# Altium PCB NumatoShieldAutoRouted.PcbDoc (part 2 of 2)
Units mm, origin at the board's own origin, x right, y up, seen from the top; angles counter-clockwise.
Board outline 127 x 127 mm, 4 copper layers (Top Layer, Mid-Layer 1, Mid-Layer 2, Bottom Layer); 8 components, 163 nets, 352 pads, 0 vias.
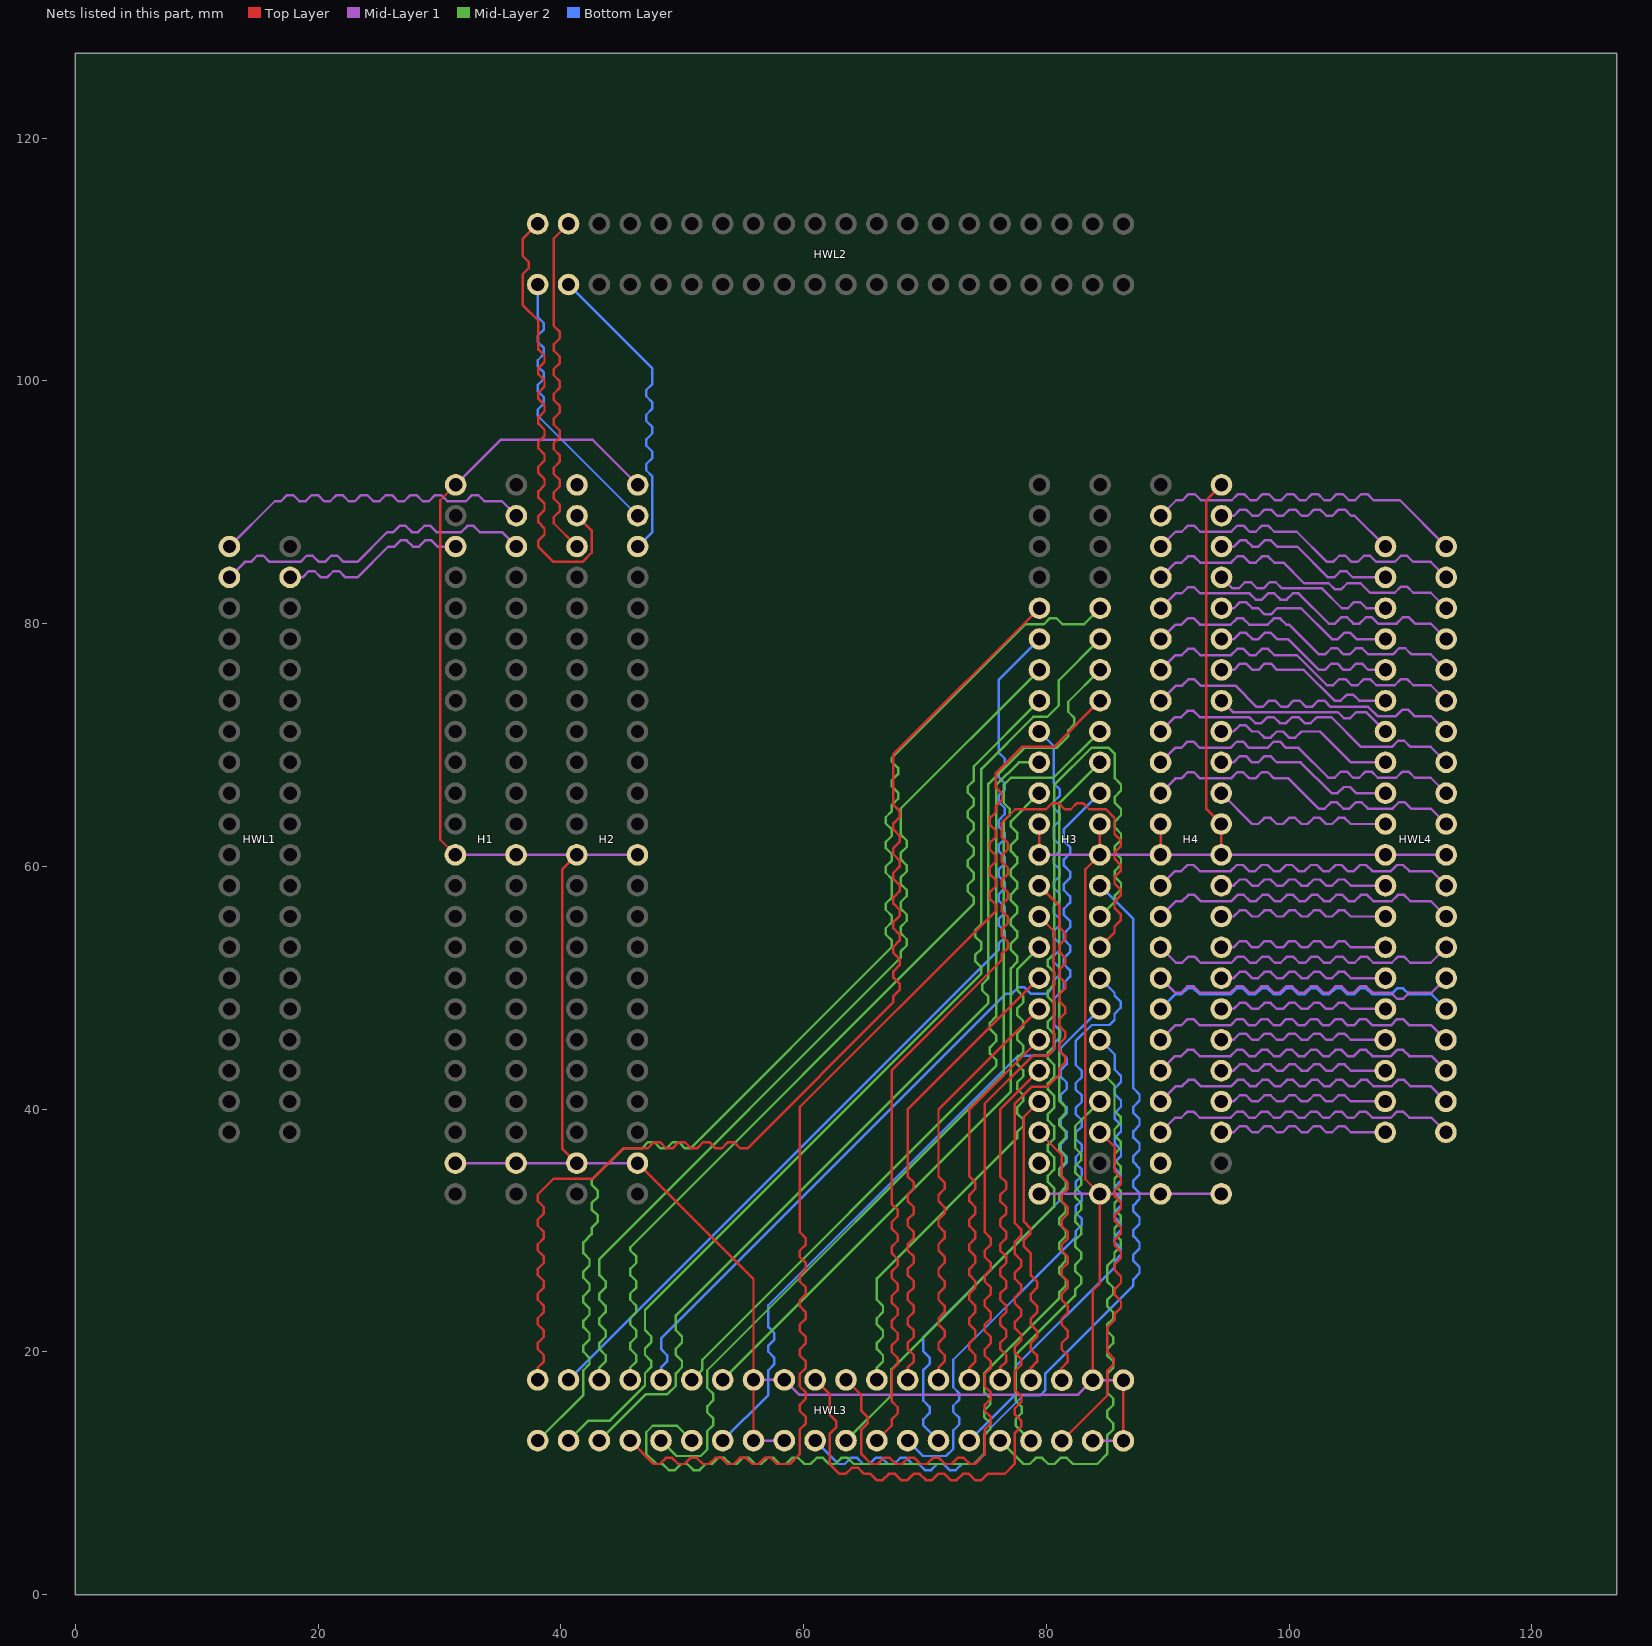
[diagram p4: the nets of this part, all layers, seen from the top]

## Nets (pads, with @x,y where several pads share a name; then routed paths per layer and width w, separated by ;. In a path a pad name is that pad's centre, name@x,y a point inside that pad or via, vN(x,y) a via of type N, cw(c..) or ccw(c..) an arc to the next point about the centre after c; other vN are vias at no path point) (continued)
GND: H1.3 H1.4 H1.23 H1.24 H1.48 H2.3 H2.4 H2.23 H2.24 H2.47 H3.1 H3.2 H3.23 H3.24 H3.25 H3.26 H4.1 H4.2 H4.23 H4.24 H4.25 H4.26 H4.47 HWL3.7 HWL3.8 HWL3.18 HWL3.19 HWL3.20 HWL3.21 HWL3.31 HWL3.32 HWL4.10 HWL4.29 | length 306.6
  Top Layer w0.203: H1.24@31.317,60.96 30.074,62.204 30.074,90.175 H1.48@31.339,91.44 ; H2.4@41.317,35.56 40.107,36.771 40.107,59.749 H2.24@41.317,60.96 ; H2.3@46.317,35.56 55.88,25.997 HWL3.32@55.88,17.7 HWL3.7@55.88,12.7 ; H3.24@79.417,60.96 H3.26@79.417,63.5 ; HWL3.21@83.82,17.679 83.82,25.044 84.417,25.642 H3.1@84.417,33.02 83.21,34.227 83.21,59.753 H3.23@84.417,60.96 H3.25@84.417,63.5 ; HWL3.19@86.36,12.679 HWL3.20@86.36,17.679 ; H4.24@89.417,60.96 H4.26@89.417,63.5 ; H4.23@94.417,60.96 H4.25@94.417,63.5 93.193,64.725 93.193,90.194 H4.47@94.439,91.44
  Mid-Layer 1 w0.203: H1.4@31.317,35.56 H1.3@36.317,35.56 H2.4@41.317,35.56 H2.3@46.317,35.56 ; H1.24@31.317,60.96 H1.23@36.317,60.96 H2.24@41.317,60.96 H2.23@46.317,60.96 ; H1.48@31.339,91.44 35.047,95.148 42.63,95.148 H2.47@46.339,91.44 ; HWL3.7@55.88,12.7 HWL3.8@58.42,12.7 ; HWL3.32@55.88,17.7 HWL3.31@58.42,17.7 59.635,16.485 82.626,16.485 HWL3.21@83.82,17.679 HWL3.20@86.36,17.679 ; H3.2@79.417,33.02 H3.1@84.417,33.02 H4.2@89.417,33.02 H4.1@94.417,33.02 ; H3.24@79.417,60.96 H3.23@84.417,60.96 H4.24@89.417,60.96 H4.23@94.417,60.96 HWL4.10@107.95,60.96 HWL4.29@112.95,60.96 ; HWL3.18@83.82,12.679 HWL3.19@86.36,12.679
H12: H1.45 HWL1.0 | length 29
  Mid-Layer 1 w0.203: HWL1.0@12.7,86.36 16.434,90.094 16.942,90.094 17.45,90.602 17.958,90.602 18.466,90.094 18.974,90.094 19.482,90.602 19.99,90.602 20.498,90.094 21.006,90.094 21.514,90.602 22.022,90.602 22.53,90.094 23.038,90.094 23.546,90.602 24.054,90.602 24.562,90.094 25.07,90.094 25.578,90.602 26.086,90.602 26.594,90.094 27.102,90.094 27.61,90.602 28.118,90.602 28.626,90.094 29.134,90.094 29.642,90.602 30.15,90.602 30.658,90.094 32.182,90.094 32.69,90.602 33.198,90.602 33.706,90.094 35.145,90.094 H1.45@36.339,88.9
H13: H2.43 HWL2.1 | length 26.6
  Bottom Layer w0.203: HWL2.1@40.64,107.95 47.549,101.041 47.549,99.762 47.041,99.254 47.041,98.746 47.549,98.238 47.549,97.73 47.041,97.222 47.041,96.714 47.549,96.206 47.549,95.698 47.041,95.19 47.041,94.682 47.549,94.174 47.549,93.666 47.041,93.158 47.041,92.65 47.549,92.142 47.549,87.57 H2.43@46.339,86.36
H14: H2.44 HWL2.38 | length 31.3
  Top Layer w0.203: HWL2.38@40.64,112.95 39.421,111.731 39.421,104.534 39.929,104.026 39.929,103.518 39.421,103.01 39.421,102.502 39.929,101.994 39.929,101.486 39.421,100.978 39.421,100.47 39.929,99.962 39.929,99.454 39.421,98.946 39.421,98.438 39.929,97.93 39.929,97.422 39.421,96.914 39.421,96.406 39.929,95.898 39.929,95.39 39.421,94.882 39.421,94.374 39.929,93.866 39.929,93.358 39.421,92.85 39.421,92.342 39.929,91.834 39.929,91.326 39.421,90.818 39.421,90.31 39.929,89.802 39.929,89.294 39.421,88.786 39.421,88.278 H2.44@41.339,86.36
H15: H1.43 HWL1.1 | length 28.2
  Mid-Layer 1 w0.203: HWL1.1@12.7,83.82 13.97,85.09 14.478,85.09 14.986,85.598 15.494,85.598 16.002,85.09 18.542,85.09 19.05,85.598 19.558,85.598 20.066,85.09 20.574,85.09 21.082,85.598 21.59,85.598 22.098,85.09 23.241,85.09 25.705,87.554 26.213,87.554 26.721,88.062 27.229,88.062 27.737,87.554 28.245,87.554 28.753,88.062 29.261,88.062 29.769,87.554 31.801,87.554 32.309,88.062 32.817,88.062 33.325,87.554 35.145,87.554 H1.43@36.339,86.36
H16: H1.44 HWL1.38 | length 16.4
  Mid-Layer 1 w0.203: HWL1.38@17.7,83.82 18.716,83.82 19.224,84.328 19.732,84.328 20.24,83.82 20.748,83.82 21.256,84.328 21.764,84.328 22.272,83.82 23.241,83.82 25.781,86.36 26.289,86.36 26.797,86.868 27.305,86.868 27.813,86.36 28.321,86.36 28.829,86.868 29.337,86.868 29.845,86.36 H1.44@31.339,86.36
INITB: H3.4
J13: H2.45 HWL2.0 | length 24.1
  Bottom Layer w0.203: HWL2.0@38.1,107.95 38.1,105.267 38.608,104.759 38.608,104.251 38.1,103.743 38.1,103.235 38.608,102.727 38.608,102.219 38.1,101.711 38.1,101.203 38.608,100.695 38.608,100.187 38.1,99.679 38.1,99.171 38.608,98.663 38.608,98.155 38.1,97.647 38.1,97.139 H2.45@46.339,88.9
K12: H4.46 HWL4.39 | length 28.6
  Mid-Layer 1 w0.203: H4.46@89.439,88.9 90.709,90.17 91.217,90.17 91.725,90.678 92.233,90.678 92.741,90.17 95.281,90.17 95.789,90.678 96.297,90.678 96.805,90.17 97.313,90.17 97.821,90.678 98.329,90.678 98.837,90.17 99.345,90.17 99.853,90.678 100.361,90.678 100.869,90.17 101.377,90.17 101.885,90.678 102.393,90.678 102.901,90.17 103.409,90.17 103.917,90.678 104.425,90.678 104.933,90.17 105.441,90.17 105.949,90.678 106.457,90.678 106.965,90.17 109.14,90.17 HWL4.39@112.95,86.36
K13: H4.45 HWL4.0 | length 16.7
  Mid-Layer 1 w0.203: H4.45@94.439,88.9 95.455,88.9 95.963,89.408 96.471,89.408 96.979,88.9 97.487,88.9 97.995,89.408 98.503,89.408 99.011,88.9 99.519,88.9 100.027,89.408 100.535,89.408 101.043,88.9 101.551,88.9 102.059,89.408 102.567,89.408 103.075,88.9 103.583,88.9 104.091,89.408 104.599,89.408 105.107,88.9 105.41,88.9 HWL4.0@107.95,86.36
K14: H2.46 HWL2.39 | length 40.2
  Top Layer w0.203: HWL2.39@38.1,112.95 36.855,111.705 36.855,110.32 37.363,109.812 37.363,109.304 36.855,108.796 36.855,106.256 38.151,104.961 38.151,102.591 38.659,102.083 38.659,101.575 38.151,101.067 38.151,100.559 38.659,100.051 38.659,99.543 38.151,99.035 38.151,98.527 38.659,98.019 38.659,97.511 38.151,97.003 38.151,96.495 38.659,95.987 38.659,95.479 38.151,94.971 38.151,94.463 38.659,93.955 38.659,93.447 38.151,92.939 38.151,92.431 38.659,91.923 38.659,91.415 38.151,90.907 38.151,90.399 38.659,89.891 38.659,89.383 38.151,88.875 38.151,88.367 38.659,87.859 38.659,87.351 38.151,86.843 38.151,86.335 39.395,85.09 41.783,85.09 42.545,85.852 42.545,87.694 H2.46@41.339,88.9
K15: H3.38 HWL3.38 | length 80.5
  Bottom Layer w0.203: HWL3.38@40.64,17.7 76.073,53.133 76.073,53.641 76.581,54.149 76.581,54.657 76.073,55.165 76.073,55.673 76.581,56.181 76.581,56.689 76.073,57.197 76.073,57.705 76.581,58.213 76.581,58.721 76.073,59.229 76.073,59.737 76.581,60.245 76.581,60.753 76.073,61.261 76.073,61.769 76.581,62.277 76.581,62.785 76.073,63.293 76.073,63.801 76.581,64.309 76.581,64.817 76.073,65.325 76.073,65.833 76.581,66.341 76.581,66.849 76.073,67.357 76.073,67.865 76.581,68.373 76.581,68.881 76.073,69.389 76.073,75.374 H3.38@79.439,78.74
K16: H3.37 HWL3.1 | length 87.6
  Mid-Layer 2 w0.203: HWL3.1@40.64,12.7 42.291,14.351 44.059,14.351 46.939,17.231 46.939,18.247 47.447,18.755 47.447,19.263 46.939,19.771 46.939,20.279 47.447,20.787 47.447,21.295 46.939,21.803 46.939,23.47 74.651,51.181 74.651,51.689 74.143,52.197 74.143,52.705 74.651,53.213 74.651,53.721 74.143,54.229 74.143,54.737 74.651,55.245 74.651,68.047 78.943,72.339 80.086,72.339 81.026,73.279 81.026,75.327 H3.37@84.439,78.74
L12: H3.40 HWL3.39 | length 96.6
  Top Layer w0.203: HWL3.39@38.1,17.7 38.1,18.716 38.608,19.224 38.608,19.732 38.1,20.24 38.1,20.748 38.608,21.256 38.608,21.764 38.1,22.272 38.1,22.78 38.608,23.288 38.608,23.796 38.1,24.304 38.1,24.812 38.608,25.32 38.608,25.828 38.1,26.336 38.1,26.844 38.608,27.352 38.608,27.86 38.1,28.368 38.1,28.876 38.608,29.384 38.608,29.892 38.1,30.4 38.1,30.908 38.608,31.416 38.608,31.924 38.1,32.432 38.1,32.969 39.421,34.29 42.647,34.29 45.136,36.779 47.168,36.779 47.676,37.287 48.184,37.287 48.692,36.779 49.2,36.779 49.708,37.287 50.216,37.287 50.724,36.779 51.232,36.779 51.74,37.287 52.248,37.287 52.756,36.779 53.264,36.779 53.772,37.287 54.28,37.287 54.788,36.779 55.372,36.779 67.412,48.819 67.412,49.327 67.92,49.835 67.92,50.343 67.412,50.851 67.412,51.359 67.92,51.867 67.92,52.375 67.412,52.883 67.412,53.391 67.92,53.899 67.92,54.407 67.412,54.915 67.412,55.423 67.92,55.931 67.92,56.439 67.412,56.947 67.412,57.455 67.92,57.963 67.92,58.471 67.412,58.979 67.412,59.487 67.92,59.995 67.92,60.503 67.412,61.011 67.412,61.519 67.92,62.027 67.92,62.535 67.412,63.043 67.412,63.551 67.92,64.059 67.92,64.567 67.412,65.075 67.412,69.253 H3.40@79.439,81.28
L13: H3.39 HWL3.0 | length 101
  Mid-Layer 2 w0.203: HWL3.0@38.1,12.7 41.859,16.459 41.859,18.491 42.367,18.999 42.367,19.507 41.859,20.015 41.859,20.523 42.367,21.031 42.367,21.539 41.859,22.047 41.859,22.555 42.367,23.063 42.367,23.571 41.859,24.079 41.859,24.587 42.367,25.095 42.367,25.603 41.859,26.111 41.859,26.619 42.367,27.127 42.367,27.635 41.859,28.143 41.859,29.032 42.545,29.718 42.545,30.226 43.053,30.734 43.053,31.242 42.545,31.75 42.545,32.258 43.053,32.766 43.053,33.274 42.545,33.782 42.545,34.163 45.161,36.779 46.685,36.779 47.193,37.287 47.701,37.287 48.209,36.779 48.717,36.779 49.225,37.287 49.733,37.287 50.241,36.779 50.673,36.779 67.285,53.391 67.285,53.899 66.777,54.407 66.777,54.915 67.285,55.423 67.285,55.931 66.777,56.439 66.777,56.947 67.285,57.455 67.285,58.979 66.777,59.487 66.777,59.995 67.285,60.503 67.285,61.011 66.777,61.519 66.777,62.027 67.285,62.535 67.285,63.043 66.777,63.551 66.777,64.059 67.285,64.567 67.285,65.075 67.793,65.583 67.793,66.091 67.285,66.599 67.285,67.107 67.793,67.615 67.793,68.123 67.285,68.631 67.285,68.961 78.283,79.959 79.807,79.959 80.315,80.467 80.823,80.467 81.331,79.959 83.118,79.959 H3.39@84.439,81.28
L14: H4.44 HWL4.38 | length 28.1
  Mid-Layer 1 w0.203: H4.44@89.439,86.36 90.658,87.579 91.166,87.579 91.674,88.087 92.182,88.087 92.69,87.579 95.23,87.579 95.738,88.087 96.246,88.087 96.754,87.579 97.262,87.579 97.77,88.087 98.278,88.087 98.786,87.579 100.635,87.579 103.124,85.09 103.632,85.09 104.14,85.598 104.648,85.598 105.156,85.09 105.664,85.09 106.172,85.598 106.68,85.598 107.188,85.09 108.712,85.09 109.22,85.598 109.728,85.598 110.236,85.09 111.68,85.09 HWL4.38@112.95,83.82
L15: H4.40 HWL4.36 | length 28.1
  Mid-Layer 1 w0.203: H4.40@89.439,81.28 90.658,82.499 91.166,82.499 91.674,83.007 92.182,83.007 92.69,82.499 96.754,82.499 97.262,81.991 97.77,81.991 98.278,82.499 98.786,82.499 99.294,81.991 99.802,81.991 100.31,82.499 100.787,82.499 103.276,80.01 103.784,80.01 104.292,80.518 104.8,80.518 105.308,80.01 105.816,80.01 106.324,80.518 106.832,80.518 107.34,80.01 108.864,80.01 109.372,80.518 109.88,80.518 110.388,80.01 111.68,80.01 HWL4.36@112.95,78.74
L16: H4.39 HWL4.3 | length 15.8
  Mid-Layer 1 w0.203: H4.39@94.439,81.28 95.455,81.28 95.963,81.788 96.471,81.788 96.979,81.28 97.487,81.28 97.995,80.772 98.503,80.772 99.011,81.28 100.988,81.28 103.528,78.74 104.036,78.74 104.544,79.248 105.052,79.248 105.56,78.74 HWL4.3@107.95,78.74
M8: H4.16 HWL4.25 | length 27.9
  Mid-Layer 1 w0.203: H4.16@89.417,50.8 90.611,49.606 91.119,49.606 91.627,50.114 92.135,50.114 92.643,49.606 95.183,49.606 95.691,50.114 96.199,50.114 96.707,49.606 97.215,49.606 97.723,50.114 98.231,50.114 98.739,49.606 99.247,49.606 99.755,50.114 100.263,50.114 100.771,49.606 101.279,49.606 101.787,50.114 102.295,50.114 102.803,49.606 103.311,49.606 103.819,50.114 104.327,50.114 104.835,49.606 105.343,49.606 105.851,50.114 106.359,50.114 106.867,49.606 108.391,49.606 108.899,49.098 109.407,49.098 109.915,49.606 111.756,49.606 HWL4.25@112.95,50.8
M10: H4.20 HWL4.27 | length 28
  Mid-Layer 1 w0.203: H4.20@89.417,55.88 90.687,57.15 91.195,57.15 91.703,57.658 92.211,57.658 92.719,57.15 95.259,57.15 95.767,57.658 96.275,57.658 96.783,57.15 97.291,57.15 97.799,57.658 98.307,57.658 98.815,57.15 99.323,57.15 99.831,57.658 100.339,57.658 100.847,57.15 101.355,57.15 101.863,57.658 102.371,57.658 102.879,57.15 103.387,57.15 103.895,57.658 104.403,57.658 104.911,57.15 105.419,57.15 105.927,57.658 106.435,57.658 106.943,57.15 108.467,57.15 108.975,57.658 109.483,57.658 109.991,57.15 111.68,57.15 HWL4.27@112.95,55.88
M11: H4.28 HWL4.30 | length 28.1
  Mid-Layer 1 w0.203: H4.28@89.417,66.04 90.637,67.259 91.145,67.259 91.653,67.767 92.161,67.767 92.669,67.259 95.209,67.259 95.717,67.767 96.225,67.767 96.733,67.259 97.241,67.259 97.749,67.767 98.257,67.767 98.765,67.259 99.949,67.259 102.438,64.77 102.946,64.77 103.454,65.278 103.962,65.278 104.47,64.77 104.978,64.77 105.486,65.278 105.994,65.278 106.502,64.77 108.534,64.77 109.042,65.278 109.55,65.278 110.058,64.77 111.68,64.77 HWL4.30@112.95,63.5
M13: H4.43 HWL4.1 | length 15.8
  Mid-Layer 1 w0.203: H4.43@94.439,86.36 95.455,86.36 95.963,86.868 96.471,86.868 96.979,86.36 97.487,86.36 97.995,86.868 98.503,86.868 99.011,86.36 100.683,86.36 103.223,83.82 103.731,83.82 104.239,84.328 104.747,84.328 105.255,83.82 HWL4.1@107.95,83.82
M14: H4.42 HWL4.37 | length 27.7
  Mid-Layer 1 w0.203: H4.42@89.439,83.82 90.658,85.039 91.166,85.039 91.674,85.547 92.182,85.547 92.69,85.039 95.23,85.039 95.738,85.547 96.246,85.547 96.754,85.039 97.262,85.039 97.77,85.547 98.278,85.547 98.786,85.039 99.543,85.039 101.244,83.337 103.276,83.337 103.784,82.829 104.292,82.829 104.8,83.337 105.893,83.337 106.68,82.55 108.712,82.55 109.22,83.058 109.728,83.058 110.236,82.55 111.68,82.55 HWL4.37@112.95,81.28
N5: H3.10 HWL3.24 | length 30.2
  Top Layer w0.203: HWL3.24@76.2,17.7 76.2,18.716 76.708,19.224 76.708,19.732 76.2,20.24 76.2,20.748 76.708,21.256 76.708,21.764 76.2,22.272 76.2,22.78 76.708,23.288 76.708,23.796 76.2,24.304 76.2,24.812 76.708,25.32 76.708,25.828 76.2,26.336 76.2,26.844 76.708,27.352 76.708,27.86 76.2,28.368 76.2,28.876 76.708,29.384 76.708,29.892 76.2,30.4 76.2,30.908 76.708,31.416 76.708,31.924 76.2,32.432 76.2,32.94 76.708,33.448 76.708,33.956 76.2,34.464 76.2,39.963 H3.10@79.417,43.18
N6: H4.12 HWL4.23 | length 27.9
  Mid-Layer 1 w0.203: H4.12@89.417,45.72 90.611,46.914 91.119,46.914 91.627,47.422 92.135,47.422 92.643,46.914 95.183,46.914 95.691,47.422 96.199,47.422 96.707,46.914 97.215,46.914 97.723,47.422 98.231,47.422 98.739,46.914 99.247,46.914 99.755,47.422 100.263,47.422 100.771,46.914 101.279,46.914 101.787,47.422 102.295,47.422 102.803,46.914 103.311,46.914 103.819,47.422 104.327,47.422 104.835,46.914 105.343,46.914 105.851,47.422 106.359,47.422 106.867,46.914 108.391,46.914 108.899,47.422 109.407,47.422 109.915,46.914 111.735,46.914 HWL4.23@112.929,45.72
N7: H3.16 HWL3.27 | length 41
  Top Layer w0.203: HWL3.27@68.58,17.7 68.58,18.716 69.088,19.224 69.088,19.732 68.58,20.24 68.58,20.748 69.088,21.256 69.088,21.764 68.58,22.272 68.58,22.78 69.088,23.288 69.088,23.796 68.58,24.304 68.58,24.812 69.088,25.32 69.088,25.828 68.58,26.336 68.58,26.844 69.088,27.352 69.088,27.86 68.58,28.368 68.58,28.876 69.088,29.384 69.088,29.892 68.58,30.4 68.58,30.908 69.088,31.416 69.088,31.924 68.58,32.432 68.58,32.94 69.088,33.448 69.088,33.956 68.58,34.464 68.58,39.963 H3.16@79.417,50.8
N8: H4.15 HWL4.14 | length 15.6
  Mid-Layer 1 w0.203: H4.15@94.417,50.8 95.433,50.8 95.941,51.308 96.449,51.308 96.957,50.8 97.465,50.8 97.973,51.308 98.481,51.308 98.989,50.8 99.497,50.8 100.005,51.308 100.513,51.308 101.021,50.8 101.529,50.8 102.037,51.308 102.545,51.308 103.053,50.8 103.561,50.8 104.069,51.308 104.577,51.308 105.085,50.8 HWL4.14@107.95,50.8
N9: H4.19 HWL4.12 | length 15.6
  Mid-Layer 1 w0.203: H4.19@94.417,55.88 95.433,55.88 95.941,56.388 96.449,56.388 96.957,55.88 97.465,55.88 97.973,56.388 98.481,56.388 98.989,55.88 99.497,55.88 100.005,56.388 100.513,56.388 101.021,55.88 101.529,55.88 102.037,56.388 102.545,56.388 103.053,55.88 103.561,55.88 104.069,56.388 104.577,56.388 105.085,55.88 HWL4.12@107.95,55.88
N10: H3.22 HWL3.30 | length 82.8
  Top Layer w0.203: HWL3.30@60.96,17.7 62.179,16.481 62.179,14.808 62.687,14.3 62.687,13.792 62.179,13.284 62.179,10.744 62.967,9.957 63.475,9.957 63.983,10.465 64.491,10.465 64.999,9.957 65.507,9.957 66.015,9.449 66.523,9.449 67.031,9.957 67.539,9.957 68.047,9.449 68.555,9.449 69.063,9.957 69.571,9.957 70.079,9.449 70.587,9.449 71.095,9.957 71.603,9.957 72.111,9.449 72.619,9.449 73.127,9.957 73.635,9.957 74.143,9.449 74.651,9.449 75.159,9.957 76.581,9.957 77.419,10.795 77.419,13.335 77.927,13.843 77.927,14.351 77.419,14.859 77.419,15.367 77.927,15.875 77.927,16.383 77.419,16.891 77.419,18.415 77.927,18.923 77.927,19.431 77.419,19.939 77.419,20.447 77.927,20.955 77.927,21.463 77.419,21.971 77.419,22.479 77.927,22.987 77.927,23.495 77.419,24.003 77.419,24.511 77.927,25.019 77.927,25.527 77.419,26.035 77.419,26.543 77.927,27.051 77.927,27.559 77.419,28.067 77.419,29.083 77.927,29.591 77.927,30.099 77.419,30.607 77.419,40.462 78.791,41.834 80.061,41.834 81.051,42.824 81.051,43.332 81.559,43.84 81.559,44.348 81.051,44.856 81.051,45.364 81.559,45.872 81.559,46.38 81.051,46.888 81.051,47.396 81.559,47.904 81.559,48.412 81.051,48.92 81.051,49.428 81.559,49.936 81.559,50.444 81.051,50.952 81.051,51.46 81.559,51.968 81.559,52.476 81.051,52.984 81.051,53.492 81.559,54 81.559,54.508 81.051,55.016 81.051,56.786 H3.22@79.417,58.42
N11: H4.27 HWL4.9 | length 16.3
  Mid-Layer 1 w0.203: H4.27@94.417,66.04 96.957,63.5 97.465,63.5 97.973,64.008 98.481,64.008 98.989,63.5 99.497,63.5 100.005,64.008 100.513,64.008 101.021,63.5 101.529,63.5 102.037,64.008 102.545,64.008 103.053,63.5 103.561,63.5 104.069,64.008 104.577,64.008 105.085,63.5 HWL4.9@107.95,63.5
N14: H4.41 HWL4.2 | length 15.8
  Mid-Layer 1 w0.203: H4.41@94.439,83.82 95.353,82.906 95.861,82.906 96.369,83.414 96.877,83.414 97.385,82.906 97.893,82.906 98.401,83.414 98.909,83.414 99.417,82.906 102.724,82.906 104.349,81.28 104.857,81.28 105.365,81.788 105.873,81.788 106.381,81.28 HWL4.2@107.95,81.28
N15: H4.38 HWL4.35 | length 28.1
  Mid-Layer 1 w0.203: H4.38@89.439,78.74 90.632,79.934 91.14,79.934 91.648,80.442 92.156,80.442 92.664,79.934 95.204,79.934 95.712,80.442 96.22,80.442 96.728,79.934 98.252,79.934 98.76,80.442 99.268,80.442 99.776,79.934 100,79.934 102.464,77.47 102.972,77.47 103.48,77.978 103.988,77.978 104.496,77.47 105.004,77.47 105.512,77.978 106.02,77.978 106.528,77.47 108.56,77.47 109.068,77.978 109.576,77.978 110.084,77.47 111.68,77.47 HWL4.35@112.95,76.2
N16: H4.37 HWL4.4 | length 16.2
  Mid-Layer 1 w0.203: H4.37@94.439,78.74 95.455,78.74 95.963,79.248 96.471,79.248 96.979,78.74 97.487,78.74 97.995,79.248 98.503,79.248 99.011,78.74 99.924,78.74 102.464,76.2 102.972,76.2 103.48,76.708 103.988,76.708 104.496,76.2 105.004,76.2 105.512,76.708 106.02,76.708 106.528,76.2 HWL4.4@107.95,76.2
P6: H3.9 HWL3.15 | length 48.2
  Mid-Layer 2 w0.203: HWL3.15@76.2,12.7 78.13,10.77 78.638,10.77 79.146,11.278 79.654,11.278 80.162,10.77 80.67,10.77 81.178,11.278 81.686,11.278 82.194,10.77 84.201,10.77 85.014,11.582 85.014,13.106 85.522,13.614 85.522,14.122 85.014,14.63 85.014,15.138 85.522,15.646 85.522,16.154 85.014,16.662 85.014,18.186 85.522,18.694 85.522,19.202 85.014,19.71 85.014,20.218 85.522,20.726 85.522,21.234 85.014,21.742 85.014,22.25 85.522,22.758 85.522,23.266 85.014,23.774 85.014,24.282 85.522,24.79 85.522,25.298 85.014,25.806 85.014,27.076 85.623,27.686 85.623,28.194 86.131,28.702 86.131,29.21 85.623,29.718 85.623,30.226 86.131,30.734 86.131,31.242 85.623,31.75 85.623,32.258 86.131,32.766 86.131,33.274 85.623,33.782 85.623,34.29 86.131,34.798 86.131,35.306 85.623,35.814 85.623,36.322 86.131,36.83 86.131,37.338 85.623,37.846 85.623,38.354 86.131,38.862 86.131,39.37 85.623,39.878 85.623,41.974 H3.9@84.417,43.18
P7: H4.11 HWL4.16 | length 15.6
  Mid-Layer 1 w0.203: H4.11@94.417,45.72 95.433,45.72 95.941,46.228 96.449,46.228 96.957,45.72 97.465,45.72 97.973,46.228 98.481,46.228 98.989,45.72 99.497,45.72 100.005,46.228 100.513,46.228 101.021,45.72 101.529,45.72 102.037,46.228 102.545,46.228 103.053,45.72 103.561,45.72 104.069,46.228 104.577,46.228 105.085,45.72 HWL4.16@107.929,45.72
P8: H3.15 HWL3.12 | length 54.4
  Bottom Layer w0.203: HWL3.12@68.58,12.7 69.85,11.43 71.755,11.43 72.339,12.014 72.339,13.538 72.847,14.046 72.847,14.554 72.339,15.062 72.339,15.57 72.847,16.078 72.847,16.586 72.339,17.094 72.339,19.355 82.423,29.439 82.423,29.947 82.931,30.455 82.931,30.963 82.423,31.471 82.423,31.979 82.931,32.487 82.931,32.995 82.423,33.503 82.423,34.011 82.931,34.519 82.931,35.027 82.423,35.535 82.423,36.043 82.931,36.551 82.931,37.059 82.423,37.567 82.423,38.075 82.931,38.583 82.931,39.091 82.423,39.599 82.423,40.107 82.931,40.615 82.931,41.123 82.423,41.631 82.423,42.139 82.931,42.647 82.931,43.155 82.423,43.663 82.423,45.618 83.744,46.939 85.217,46.939 85.623,47.346 85.623,47.854 86.131,48.362 86.131,48.87 85.623,49.378 85.623,49.594 H3.15@84.417,50.8
P11: H3.21 HWL3.9 | length 74.4
  Bottom Layer w0.203: HWL3.9@60.96,12.7 62.89,10.77 63.398,10.77 63.906,11.278 64.414,11.278 64.922,10.77 65.43,10.77 65.938,11.278 66.446,11.278 66.954,10.77 67.462,10.77 67.97,11.278 68.478,11.278 68.986,10.77 69.494,10.77 70.002,10.262 70.51,10.262 71.018,10.77 71.526,10.77 72.034,10.262 72.542,10.262 73.05,10.77 74.117,10.77 74.93,11.582 74.93,13.259 78.105,16.434 79.502,16.434 79.934,16.866 79.934,18.237 87.173,25.476 87.173,25.984 87.681,26.492 87.681,27 87.173,27.508 87.173,28.016 87.681,28.524 87.681,29.032 87.173,29.54 87.173,30.048 87.681,30.556 87.681,31.064 87.173,31.572 87.173,32.08 87.681,32.588 87.681,33.096 87.173,33.604 87.173,34.112 87.681,34.62 87.681,35.128 87.173,35.636 87.173,36.144 87.681,36.652 87.681,37.16 87.173,37.668 87.173,38.176 87.681,38.684 87.681,39.192 87.173,39.7 87.173,40.208 87.681,40.716 87.681,41.224 87.173,41.732 87.173,55.665 H3.21@84.417,58.42
P15: H4.36 HWL4.34 | length 28.1
  Mid-Layer 1 w0.203: H4.36@89.439,76.2 90.658,77.419 91.166,77.419 91.674,77.927 92.182,77.927 92.69,77.419 95.23,77.419 95.738,77.927 96.246,77.927 96.754,77.419 97.262,77.419 97.77,77.927 98.278,77.927 98.786,77.419 100.635,77.419 103.124,74.93 103.632,74.93 104.14,75.438 104.648,75.438 105.156,74.93 105.664,74.93 106.172,75.438 106.68,75.438 107.188,74.93 108.712,74.93 109.22,75.438 109.728,75.438 110.236,74.93 111.68,74.93 HWL4.34@112.95,73.66
P16: H4.35 HWL4.5 | length 15.8
  Mid-Layer 1 w0.203: H4.35@94.439,76.2 95.455,76.2 95.963,76.708 96.471,76.708 96.979,76.2 97.487,76.2 97.995,76.708 98.503,76.708 99.011,76.2 101.219,76.2 103.759,73.66 104.267,73.66 104.775,74.168 105.283,74.168 105.791,73.66 HWL4.5@107.95,73.66
PROGB: H4.4
R3: H3.6 HWL3.22 | length 24.6
  Top Layer w0.203: H3.6@79.417,38.1 81.28,36.237 81.28,34.443 81.788,33.935 81.788,33.427 81.28,32.919 81.28,32.411 81.788,31.903 81.788,31.395 81.28,30.887 81.28,30.379 81.788,29.871 81.788,29.363 81.28,28.855 81.28,28.347 81.788,27.839 81.788,27.331 81.28,26.823 81.28,26.315 81.788,25.807 81.788,25.299 81.28,24.791 81.28,24.283 81.788,23.775 81.788,23.267 81.28,22.759 81.28,22.251 81.788,21.743 81.788,21.235 81.28,20.727 81.28,20.219 81.788,19.711 81.788,19.203 81.28,18.695 HWL3.22@81.28,17.679
R5: H3.8 HWL3.23 | length 25.8
  Top Layer w0.203: HWL3.23@78.74,17.679 78.74,18.695 79.248,19.203 79.248,19.711 78.74,20.219 78.74,20.727 79.248,21.235 79.248,21.743 78.74,22.251 78.74,22.759 79.248,23.267 79.248,23.775 78.74,24.283 78.74,24.791 79.248,25.299 79.248,25.807 78.74,26.315 78.74,28.118 78.156,28.702 78.156,29.21 78.664,29.718 78.664,30.226 78.156,30.734 78.156,39.378 H3.8@79.417,40.64
R7: H3.12 HWL3.25 | length 33.8
  Top Layer w0.203: HWL3.25@73.66,17.7 73.66,18.716 74.168,19.224 74.168,19.732 73.66,20.24 73.66,20.748 74.168,21.256 74.168,21.764 73.66,22.272 73.66,22.78 74.168,23.288 74.168,23.796 73.66,24.304 73.66,24.812 74.168,25.32 74.168,25.828 73.66,26.336 73.66,26.844 74.168,27.352 74.168,27.86 73.66,28.368 73.66,28.876 74.168,29.384 74.168,29.892 73.66,30.4 73.66,30.908 74.168,31.416 74.168,31.924 73.66,32.432 73.66,32.94 74.168,33.448 74.168,33.956 73.66,34.464 73.66,39.963 H3.12@79.417,45.72
R8: H4.18 HWL4.26 | length 28
  Mid-Layer 1 w0.203: H4.18@89.417,53.34 90.687,52.07 91.195,52.07 91.703,52.578 92.211,52.578 92.719,52.07 95.259,52.07 95.767,52.578 96.275,52.578 96.783,52.07 97.291,52.07 97.799,52.578 98.307,52.578 98.815,52.07 99.323,52.07 99.831,52.578 100.339,52.578 100.847,52.07 101.355,52.07 101.863,52.578 102.371,52.578 102.879,52.07 103.387,52.07 103.895,52.578 104.403,52.578 104.911,52.07 105.419,52.07 105.927,52.578 106.435,52.578 106.943,52.07 108.467,52.07 108.975,52.578 109.483,52.578 109.991,52.07 111.68,52.07 HWL4.26@112.95,53.34
R10: H3.20 HWL3.29 | length 70.8
  Top Layer w0.203: HWL3.29@63.5,17.7 64.77,16.43 64.77,15.138 65.278,14.63 65.278,14.122 64.77,13.614 64.77,11.582 65.583,10.77 66.091,10.77 66.599,11.278 67.107,11.278 67.615,10.77 68.123,10.77 68.631,11.278 69.139,11.278 69.647,10.77 70.155,10.77 70.663,11.278 71.171,11.278 71.679,10.77 72.187,10.77 72.695,11.278 73.203,11.278 73.711,10.77 74.117,10.77 74.93,11.582 74.93,13.614 75.438,14.122 75.438,14.63 74.93,15.138 74.93,15.646 75.438,16.154 75.438,16.662 74.93,17.17 74.93,18.186 75.438,18.694 75.438,19.202 74.93,19.71 74.93,20.218 75.438,20.726 75.438,21.234 74.93,21.742 74.93,22.25 75.438,22.758 75.438,23.266 74.93,23.774 74.93,24.282 75.438,24.79 75.438,25.298 74.93,25.806 74.93,26.314 75.438,26.822 75.438,27.33 74.93,27.838 74.93,28.346 75.438,28.854 75.438,29.362 74.93,29.87 74.93,40.462 78.867,44.399 80.112,44.399 80.62,44.907 80.62,54.678 H3.20@79.417,55.88
R11: H3.28 HWL3.33 | length 61.7
  Mid-Layer 2 w0.203: HWL3.33@53.34,17.7 77.089,41.449 77.089,51.609 77.597,52.117 77.597,52.625 77.089,53.133 77.089,53.641 77.597,54.149 77.597,54.657 77.089,55.165 77.089,55.673 77.597,56.181 77.597,56.689 77.089,57.197 77.089,57.705 77.597,58.213 77.597,58.721 77.089,59.229 77.089,59.737 77.597,60.245 77.597,60.753 77.089,61.261 77.089,61.769 77.597,62.277 77.597,62.785 77.089,63.293 77.089,63.712 H3.28@79.417,66.04
T3: H3.5 HWL3.17 | length 30.7
  Top Layer w0.203: HWL3.17@81.28,12.679 85.039,16.438 85.039,18.47 85.547,18.978 85.547,19.486 85.039,19.994 85.039,22.047 85.649,22.657 85.649,23.165 86.157,23.673 86.157,24.181 85.649,24.689 85.649,25.197 86.157,25.705 86.157,26.213 85.649,26.721 85.649,27.229 86.157,27.737 86.157,28.245 85.649,28.753 85.649,29.261 86.157,29.769 86.157,30.277 85.649,30.785 85.649,31.293 86.157,31.801 86.157,32.309 85.649,32.817 85.649,33.325 86.157,33.833 86.157,34.341 85.649,34.849 85.649,36.869 H3.5@84.417,38.1
T4: H4.6 HWL4.20 | length 27.9
  Mid-Layer 1 w0.203: H4.6@89.417,38.1 90.611,39.294 91.119,39.294 91.627,39.802 92.135,39.802 92.643,39.294 95.183,39.294 95.691,39.802 96.199,39.802 96.707,39.294 97.215,39.294 97.723,39.802 98.231,39.802 98.739,39.294 99.247,39.294 99.755,39.802 100.263,39.802 100.771,39.294 101.279,39.294 101.787,39.802 102.295,39.802 102.803,39.294 103.311,39.294 103.819,39.802 104.327,39.802 104.835,39.294 105.343,39.294 105.851,39.802 106.359,39.802 106.867,39.294 108.391,39.294 108.899,39.802 109.407,39.802 109.915,39.294 111.735,39.294 HWL4.20@112.929,38.1
T5: H3.7 HWL3.16 | length 34.3
  Mid-Layer 2 w0.203: HWL3.16@78.74,12.679 77.47,13.949 77.47,14.457 77.978,14.965 77.978,15.473 77.47,15.981 77.47,19.736 82.372,24.638 82.372,25.146 82.88,25.654 82.88,26.162 82.372,26.67 82.372,27.178 82.88,27.686 82.88,28.194 82.372,28.702 82.372,29.21 82.88,29.718 82.88,30.226 82.372,30.734 82.372,31.242 82.88,31.75 82.88,32.258 82.372,32.766 82.372,33.274 82.88,33.782 82.88,34.29 82.372,34.798 82.372,35.306 82.88,35.814 82.88,36.322 82.372,36.83 82.372,38.595 H3.7@84.417,40.64
T6: H4.10 HWL4.22 | length 27.9
  Mid-Layer 1 w0.203: H4.10@89.417,43.18 90.611,44.374 91.119,44.374 91.627,44.882 92.135,44.882 92.643,44.374 95.183,44.374 95.691,44.882 96.199,44.882 96.707,44.374 97.215,44.374 97.723,44.882 98.231,44.882 98.739,44.374 99.247,44.374 99.755,44.882 100.263,44.882 100.771,44.374 101.279,44.374 101.787,44.882 102.295,44.882 102.803,44.374 103.311,44.374 103.819,44.882 104.327,44.882 104.835,44.374 105.343,44.374 105.851,44.882 106.359,44.882 106.867,44.374 108.391,44.374 108.899,44.882 109.407,44.882 109.915,44.374 111.735,44.374 HWL4.22@112.929,43.18
T7: H3.11 HWL3.14 | length 41.9
  Bottom Layer w0.203: HWL3.14@73.66,12.7 77.47,16.51 77.47,18.821 85.649,27 85.649,27.508 86.157,28.016 86.157,28.524 85.649,29.032 85.649,29.54 86.157,30.048 86.157,30.556 85.649,31.064 85.649,31.572 86.157,32.08 86.157,32.588 85.649,33.096 85.649,33.604 86.157,34.112 86.157,34.62 85.649,35.128 85.649,35.636 86.157,36.144 86.157,36.652 85.649,37.16 85.649,37.668 86.157,38.176 86.157,38.684 85.649,39.192 85.649,39.7 86.157,40.208 86.157,40.716 85.649,41.224 85.649,41.732 86.157,42.24 86.157,42.748 85.649,43.256 85.649,44.489 H3.11@84.417,45.72
T8: H4.17 HWL4.13 | length 15.6
  Mid-Layer 1 w0.203: H4.17@94.417,53.34 95.433,53.34 95.941,53.848 96.449,53.848 96.957,53.34 97.465,53.34 97.973,53.848 98.481,53.848 98.989,53.34 99.497,53.34 100.005,53.848 100.513,53.848 101.021,53.34 101.529,53.34 102.037,53.848 102.545,53.848 103.053,53.34 103.561,53.34 104.069,53.848 104.577,53.848 105.085,53.34 HWL4.13@107.95,53.34
T9: H3.18 HWL3.28 | length 45
  Mid-Layer 2 w0.203: HWL3.28@66.04,17.7 66.04,18.716 66.548,19.224 66.548,19.732 66.04,20.24 66.04,20.748 66.548,21.256 66.548,21.764 66.04,22.272 66.04,22.78 66.548,23.288 66.548,23.796 66.04,24.304 66.04,26.06 77.597,37.617 77.597,38.125 78.105,38.633 78.105,39.141 77.597,39.649 77.597,40.157 78.105,40.665 78.105,41.173 77.597,41.681 77.597,42.189 78.105,42.697 78.105,43.205 77.597,43.713 77.597,44.221 78.105,44.729 78.105,45.237 77.597,45.745 77.597,46.253 78.105,46.761 78.105,47.269 77.597,47.777 77.597,48.285 78.105,48.793 78.105,49.301 77.597,49.809 77.597,51.52 H3.18@79.417,53.34
T10: H3.19 HWL3.10 | length 87
  Mid-Layer 2 w0.203: HWL3.10@63.5,12.7 67.234,16.434 67.234,18.567 80.645,31.979 80.645,33.503 80.137,34.011 80.137,34.519 80.645,35.027 80.645,36.043 80.137,36.551 80.137,37.059 80.645,37.567 80.645,38.583 80.137,39.091 80.137,39.599 80.645,40.107 80.645,41.123 80.137,41.631 80.137,42.139 80.645,42.647 80.645,43.663 80.137,44.171 80.137,44.679 80.645,45.187 80.645,46.203 80.137,46.711 80.137,47.219 80.645,47.727 80.645,48.743 80.137,49.251 80.137,49.759 80.645,50.267 80.645,51.283 80.137,51.791 80.137,52.299 80.645,52.807 80.645,66.7 83.744,69.799 85.115,69.799 85.649,69.266 85.649,67.271 86.157,66.763 86.157,66.255 85.649,65.747 85.649,65.239 86.157,64.731 86.157,64.223 85.649,63.715 85.649,63.207 86.157,62.699 86.157,62.191 85.649,61.683 85.649,61.175 86.157,60.667 86.157,60.159 85.649,59.651 85.649,59.143 86.157,58.635 86.157,58.127 85.649,57.619 85.649,57.111 H3.19@84.417,55.88
T11: H3.27 HWL3.6 | length 71.4
  Bottom Layer w0.203: HWL3.6@53.34,12.7 57.099,16.459 57.099,18.491 57.607,18.999 57.607,19.507 57.099,20.015 57.099,20.523 57.607,21.031 57.607,21.539 57.099,22.047 57.099,23.851 77.648,44.399 80.112,44.399 80.645,44.933 80.645,45.441 81.153,45.949 81.153,46.457 80.645,46.965 80.645,49.098 81.458,49.911 81.458,50.419 81.966,50.927 81.966,51.435 81.458,51.943 81.458,52.451 81.966,52.959 81.966,53.467 81.458,53.975 81.458,54.483 81.966,54.991 81.966,55.499 81.458,56.007 81.458,56.515 81.966,57.023 81.966,57.531 81.458,58.039 81.458,58.547 81.966,59.055 81.966,59.563 81.458,60.071 81.458,60.579 81.966,61.087 81.966,61.595 81.458,62.103 81.458,63.08 H3.27@84.417,66.04
T12: H3.30 HWL3.34 | length 64.6
  Mid-Layer 2 w0.203: HWL3.34@50.8,17.7 51.664,18.564 51.664,19.362 75.87,43.568 75.87,44.076 75.362,44.584 75.362,45.092 75.87,45.6 75.87,46.108 75.362,46.616 75.362,47.124 75.87,47.632 75.87,66.7 77.749,68.58 H3.30@79.417,68.58
T14: H3.32 HWL3.35 | length 73.5
  Bottom Layer w0.203: HWL3.35@48.26,17.7 48.26,18.716 48.768,19.224 48.768,19.732 48.26,20.24 48.26,21.107 76.683,49.53 77.191,49.53 77.699,50.038 78.207,50.038 78.715,49.53 80.061,49.53 80.62,50.089 80.62,50.597 81.128,51.105 81.128,51.613 80.62,52.121 80.62,52.629 81.128,53.137 81.128,53.645 80.62,54.153 80.62,54.661 81.128,55.169 81.128,55.677 80.62,56.185 80.62,56.693 81.128,57.201 81.128,57.709 80.62,58.217 80.62,58.725 81.128,59.233 81.128,59.741 80.62,60.249 80.62,60.757 81.128,61.265 81.128,61.773 80.62,62.281 80.62,63.297 81.128,63.805 81.128,64.313 80.62,64.821 80.62,65.329 81.128,65.837 81.128,66.345 80.62,66.853 80.62,69.918 H3.32@79.417,71.12
T17: H3.36 HWL3.37 | length 77.3
  Mid-Layer 2 w0.203: HWL3.37@43.18,17.7 43.18,18.716 43.688,19.224 43.688,19.732 43.18,20.24 43.18,20.748 43.688,21.256 43.688,21.764 43.18,22.272 43.18,22.78 43.688,23.288 43.688,23.796 43.18,24.304 43.18,24.812 43.688,25.32 43.688,25.828 43.18,26.336 43.18,27.661 67.996,52.476 67.996,52.984 68.504,53.492 68.504,54 67.996,54.508 67.996,55.016 68.504,55.524 68.504,56.032 67.996,56.54 67.996,57.048 68.504,57.556 68.504,58.064 67.996,58.572 67.996,59.08 68.504,59.588 68.504,60.096 67.996,60.604 67.996,61.112 68.504,61.62 68.504,62.128 67.996,62.636 67.996,64.757 H3.36@79.439,76.2
T18: H3.35 HWL3.2 | length 84.9
  Mid-Layer 2 w0.203: HWL3.2@43.18,12.7 46.986,16.506 48.768,16.506 49.479,17.217 49.479,18.233 49.987,18.741 49.987,19.249 49.479,19.757 49.479,20.265 49.987,20.773 49.987,21.281 49.479,21.789 49.479,23.012 75.235,48.768 75.235,49.276 74.727,49.784 74.727,50.292 75.235,50.8 75.235,66.802 78.232,69.799 80.899,69.799 81.813,70.714 81.813,71.222 82.321,71.73 82.321,72.238 81.813,72.746 81.813,73.575 H3.35@84.439,76.2
U5: H4.8 HWL4.21 | length 27.9
  Mid-Layer 1 w0.203: H4.8@89.417,40.64 90.687,41.91 91.195,41.91 91.703,42.418 92.211,42.418 92.719,41.91 95.259,41.91 95.767,42.418 96.275,42.418 96.783,41.91 97.291,41.91 97.799,42.418 98.307,42.418 98.815,41.91 99.323,41.91 99.831,42.418 100.339,42.418 100.847,41.91 101.355,41.91 101.863,42.418 102.371,42.418 102.879,41.91 103.387,41.91 103.895,42.418 104.403,42.418 104.911,41.91 105.419,41.91 105.927,42.418 106.435,42.418 106.943,41.91 108.467,41.91 108.975,42.418 109.483,42.418 109.991,41.91 111.659,41.91 HWL4.21@112.929,40.64
U7: H3.14 HWL3.26 | length 37.4
  Top Layer w0.203: HWL3.26@71.12,17.7 71.12,18.716 71.628,19.224 71.628,19.732 71.12,20.24 71.12,20.748 71.628,21.256 71.628,21.764 71.12,22.272 71.12,22.78 71.628,23.288 71.628,23.796 71.12,24.304 71.12,24.812 71.628,25.32 71.628,25.828 71.12,26.336 71.12,26.844 71.628,27.352 71.628,27.86 71.12,28.368 71.12,28.876 71.628,29.384 71.628,29.892 71.12,30.4 71.12,30.908 71.628,31.416 71.628,31.924 71.12,32.432 71.12,32.94 71.628,33.448 71.628,33.956 71.12,34.464 71.12,39.963 H3.14@79.417,48.26
U8: H4.14 HWL4.24 | length 27.9
  Bottom Layer w0.203: H4.14@89.417,48.26 90.611,49.454 91.119,49.454 91.627,49.962 92.135,49.962 92.643,49.454 95.183,49.454 95.691,49.962 96.199,49.962 96.707,49.454 97.215,49.454 97.723,49.962 98.231,49.962 98.739,49.454 99.247,49.454 99.755,49.962 100.263,49.962 100.771,49.454 101.279,49.454 101.787,49.962 102.295,49.962 102.803,49.454 103.311,49.454 103.819,49.962 104.327,49.962 104.835,49.454 105.343,49.454 105.851,49.962 106.359,49.962 106.867,49.454 108.391,49.454 108.899,49.962 109.407,49.962 109.915,49.454 111.756,49.454 HWL4.24@112.95,48.26
U11: H4.22 HWL4.28 | length 27.9
  Mid-Layer 1 w0.203: H4.22@89.417,58.42 90.611,59.614 91.119,59.614 91.627,60.122 92.135,60.122 92.643,59.614 95.183,59.614 95.691,60.122 96.199,60.122 96.707,59.614 97.215,59.614 97.723,60.122 98.231,60.122 98.739,59.614 99.247,59.614 99.755,60.122 100.263,60.122 100.771,59.614 101.279,59.614 101.787,60.122 102.295,60.122 102.803,59.614 103.311,59.614 103.819,60.122 104.327,60.122 104.835,59.614 105.343,59.614 105.851,60.122 106.359,60.122 106.867,59.614 108.391,59.614 108.899,60.122 109.407,60.122 109.915,59.614 111.756,59.614 HWL4.28@112.95,58.42
U13: H4.30 HWL4.31 | length 28.1
  Mid-Layer 1 w0.203: H4.30@89.417,68.58 90.611,69.774 91.119,69.774 91.627,70.282 92.135,70.282 92.643,69.774 95.183,69.774 95.691,70.282 96.199,70.282 96.707,69.774 98.231,69.774 98.739,70.282 99.247,70.282 99.755,69.774 100.787,69.774 103.251,67.31 103.759,67.31 104.267,67.818 104.775,67.818 105.283,67.31 105.791,67.31 106.299,67.818 106.807,67.818 107.315,67.31 108.839,67.31 109.347,67.818 109.855,67.818 110.363,67.31 111.68,67.31 HWL4.31@112.95,66.04
U15: H4.32 HWL4.32 | length 27.7
  Mid-Layer 1 w0.203: H4.32@89.417,71.12 90.611,72.314 91.119,72.314 91.627,72.822 92.135,72.822 92.643,72.314 96.707,72.314 97.215,71.806 97.723,71.806 98.231,72.314 98.739,72.314 99.247,71.806 99.755,71.806 100.263,72.314 100.771,72.314 101.279,71.806 101.787,71.806 102.295,72.314 103.48,72.314 105.943,69.85 108.483,69.85 108.991,70.358 109.499,70.358 110.007,69.85 111.68,69.85 HWL4.32@112.95,68.58
U16: H3.34 HWL3.36 | length 74.1
  Mid-Layer 2 w0.203: HWL3.36@45.72,17.7 45.72,18.716 46.228,19.224 46.228,19.732 45.72,20.24 45.72,20.748 46.228,21.256 46.228,21.764 45.72,22.272 45.72,22.78 46.228,23.288 46.228,23.796 45.72,24.304 45.72,24.812 46.228,25.32 46.228,25.828 45.72,26.336 45.72,26.844 46.228,27.352 46.228,27.86 45.72,28.368 45.72,28.617 74.041,56.938 74.041,57.446 73.533,57.954 73.533,58.462 74.041,58.97 74.041,59.478 73.533,59.986 73.533,60.494 74.041,61.002 74.041,61.51 73.533,62.018 73.533,62.526 74.041,63.034 74.041,63.542 73.533,64.05 73.533,64.558 74.041,65.066 74.041,65.574 73.533,66.082 73.533,66.59 74.041,67.098 74.041,68.262 H3.34@79.439,73.66
U17: H4.34 HWL4.33 | length 27.7
  Mid-Layer 1 w0.203: H4.34@89.439,73.66 90.683,74.905 91.191,74.905 91.699,75.413 92.207,75.413 92.715,74.905 95.58,74.905 97.333,73.152 97.841,73.152 98.349,73.66 98.857,73.66 99.365,73.152 99.873,73.152 100.381,73.66 100.889,73.66 101.397,73.152 101.905,73.152 102.413,73.66 102.921,73.66 103.429,73.152 106.528,73.152 107.29,72.39 108.814,72.39 109.322,72.898 109.83,72.898 110.338,72.39 111.68,72.39 HWL4.33@112.95,71.12
U18: H4.33 HWL4.6 | length 15
  Mid-Layer 1 w0.203: H4.33@94.439,73.66 95.378,72.72 104.014,72.72 104.522,72.212 105.03,72.212 105.538,72.72 106.35,72.72 HWL4.6@107.95,71.12
V4: H4.5 HWL4.19 | length 15.6
  Mid-Layer 1 w0.203: H4.5@94.417,38.1 95.433,38.1 95.941,38.608 96.449,38.608 96.957,38.1 97.465,38.1 97.973,38.608 98.481,38.608 98.989,38.1 99.497,38.1 100.005,38.608 100.513,38.608 101.021,38.1 101.529,38.1 102.037,38.608 102.545,38.608 103.053,38.1 103.561,38.1 104.069,38.608 104.577,38.608 105.085,38.1 HWL4.19@107.929,38.1
V5: H4.7 HWL4.18 | length 15.6
  Mid-Layer 1 w0.203: H4.7@94.417,40.64 95.433,40.64 95.941,41.148 96.449,41.148 96.957,40.64 97.465,40.64 97.973,41.148 98.481,41.148 98.989,40.64 99.497,40.64 100.005,41.148 100.513,41.148 101.021,40.64 101.529,40.64 102.037,41.148 102.545,41.148 103.053,40.64 103.561,40.64 104.069,41.148 104.577,41.148 105.085,40.64 HWL4.18@107.929,40.64
V6: H4.9 HWL4.17 | length 15.6
  Mid-Layer 1 w0.203: H4.9@94.417,43.18 95.433,43.18 95.941,43.688 96.449,43.688 96.957,43.18 97.465,43.18 97.973,43.688 98.481,43.688 98.989,43.18 99.497,43.18 100.005,43.688 100.513,43.688 101.021,43.18 101.529,43.18 102.037,43.688 102.545,43.688 103.053,43.18 103.561,43.18 104.069,43.688 104.577,43.688 105.085,43.18 HWL4.17@107.929,43.18
V7: H3.13 HWL3.13 | length 45.5
  Bottom Layer w0.203: HWL3.13@71.12,12.7 69.875,13.945 69.875,14.453 70.383,14.961 70.383,15.469 69.875,15.977 69.875,18.517 70.383,19.025 70.383,19.533 69.875,20.041 69.875,21.234 81.178,32.537 81.178,33.045 81.686,33.553 81.686,34.061 81.178,34.569 81.178,35.077 81.686,35.585 81.686,36.093 81.178,36.601 81.178,37.109 81.686,37.617 81.686,38.125 81.178,38.633 81.178,39.141 81.686,39.649 81.686,40.157 81.178,40.665 81.178,41.173 81.686,41.681 81.686,42.189 81.178,42.697 81.178,43.205 81.686,43.713 81.686,44.221 81.178,44.729 81.178,45.021 H3.13@84.417,48.26
V8: H4.13 HWL4.15 | length 15.6
  Mid-Layer 1 w0.203: H4.13@94.417,48.26 95.433,48.26 95.941,48.768 96.449,48.768 96.957,48.26 97.465,48.26 97.973,48.768 98.481,48.768 98.989,48.26 99.497,48.26 100.005,48.768 100.513,48.768 101.021,48.26 101.529,48.26 102.037,48.768 102.545,48.768 103.053,48.26 103.561,48.26 104.069,48.768 104.577,48.768 105.085,48.26 HWL4.15@107.95,48.26
V9: H3.17 HWL3.11 | length 84.4
  Top Layer w0.203: HWL3.11@66.04,12.7 67.259,13.919 67.259,14.427 67.767,14.935 67.767,15.443 67.259,15.951 67.259,18.491 67.767,18.999 67.767,19.507 67.259,20.015 67.259,20.523 67.767,21.031 67.767,21.539 67.259,22.047 67.259,22.555 67.767,23.063 67.767,23.571 67.259,24.079 67.259,24.587 67.767,25.095 67.767,25.603 67.259,26.111 67.259,26.619 67.767,27.127 67.767,27.635 67.259,28.143 67.259,28.651 67.767,29.159 67.767,29.667 67.259,30.175 67.259,30.683 67.767,31.191 67.767,31.699 67.259,32.207 67.259,43.205 76.327,52.273 76.327,52.781 76.835,53.289 76.835,53.797 76.327,54.305 76.327,54.813 76.835,55.321 76.835,55.829 76.327,56.337 76.327,56.845 76.835,57.353 76.835,57.861 76.327,58.369 76.327,58.877 76.835,59.385 76.835,59.893 76.327,60.401 76.327,60.909 76.835,61.417 76.835,61.925 76.327,62.433 76.327,63.602 77.445,64.719 79.985,64.719 80.493,65.227 81.001,65.227 81.509,64.719 82.017,64.719 82.525,65.227 83.033,65.227 83.541,64.719 84.912,64.719 85.623,64.008 85.623,62.674 86.131,62.166 86.131,61.658 85.623,61.15 85.623,60.642 86.131,60.134 86.131,59.626 85.623,59.118 85.623,58.61 86.131,58.102 86.131,57.594 85.623,57.086 85.623,56.578 86.131,56.07 86.131,55.562 85.623,55.054 85.623,54.546 H3.17@84.417,53.34
V11: H4.21 HWL4.11 | length 15.6
  Mid-Layer 1 w0.203: H4.21@94.417,58.42 95.433,58.42 95.941,58.928 96.449,58.928 96.957,58.42 97.465,58.42 97.973,58.928 98.481,58.928 98.989,58.42 99.497,58.42 100.005,58.928 100.513,58.928 101.021,58.42 101.529,58.42 102.037,58.928 102.545,58.928 103.053,58.42 103.561,58.42 104.069,58.928 104.577,58.928 105.085,58.42 HWL4.11@107.95,58.42
V12: H3.29 HWL3.5 | length 103.3
  Mid-Layer 2 w0.203: HWL3.5@50.8,12.7 49.581,13.919 47.574,13.919 47.041,13.386 47.041,11.608 47.879,10.77 48.387,10.77 48.895,10.262 49.403,10.262 49.911,10.77 50.419,10.77 50.927,10.262 51.435,10.262 51.943,10.77 52.451,10.77 52.959,11.278 53.467,11.278 53.975,10.77 54.483,10.77 54.991,11.278 55.499,11.278 56.007,10.77 56.515,10.77 57.023,11.278 57.531,11.278 58.039,10.77 58.547,10.77 59.055,11.278 59.563,11.278 60.071,10.77 60.579,10.77 61.087,11.278 61.595,11.278 62.103,10.77 62.611,10.77 63.119,11.278 63.627,11.278 64.135,10.77 74.041,10.77 74.879,11.608 74.879,13.132 75.387,13.64 75.387,14.148 74.879,14.656 74.879,15.164 75.387,15.672 75.387,16.18 74.879,16.688 74.879,18.237 81.077,24.435 81.077,24.943 81.585,25.451 81.585,25.959 81.077,26.467 81.077,26.975 81.585,27.483 81.585,27.991 81.077,28.499 81.077,29.007 81.585,29.515 81.585,30.023 81.077,30.531 81.077,31.039 81.585,31.547 81.585,32.055 81.077,32.563 81.077,33.071 81.585,33.579 81.585,34.087 81.077,34.595 81.077,35.103 81.585,35.611 81.585,36.119 81.077,36.627 81.077,37.135 81.585,37.643 81.585,38.151 81.077,38.659 81.077,39.167 81.585,39.675 81.585,40.183 81.077,40.691 81.077,65.239 H3.29@84.417,68.58
V13: H4.29 HWL4.8 | length 15.8
  Mid-Layer 1 w0.203: H4.29@94.417,68.58 95.433,68.58 95.941,69.088 96.449,69.088 96.957,68.58 97.465,68.58 97.973,69.088 98.481,69.088 98.989,68.58 100.963,68.58 103.503,66.04 104.011,66.04 104.519,66.548 105.027,66.548 105.535,66.04 HWL4.8@107.95,66.04
V14: H3.31 HWL3.4 | length 80.4
  Mid-Layer 2 w0.203: HWL3.4@48.26,12.7 49.53,11.43 51.537,11.43 52.07,11.963 52.07,13.487 52.578,13.995 52.578,14.503 52.07,15.011 52.07,15.519 52.578,16.027 52.578,16.535 52.07,17.043 52.07,18.491 76.479,42.901 76.479,63.729 76.987,64.237 76.987,64.745 76.479,65.253 76.479,66.7 77.089,67.31 80.607,67.31 H3.31@84.417,71.12
V15: H4.31 HWL4.7 | length 15.8
  Mid-Layer 1 w0.203: H4.31@94.417,71.12 95.433,71.12 95.941,71.628 96.449,71.628 96.957,71.12 97.465,71.12 97.973,70.612 98.481,70.612 98.989,71.12 99.497,71.12 100.005,70.612 100.513,70.612 101.021,71.12 102.565,71.12 105.105,68.58 HWL4.7@107.95,68.58
V16: H3.33 HWL3.3 | length 96.5
  Top Layer w0.203: HWL3.3@45.72,12.7 47.65,10.77 48.158,10.77 48.666,11.278 49.174,11.278 49.682,10.77 50.19,10.77 50.698,11.278 51.206,11.278 51.714,10.77 52.222,10.77 52.73,11.278 53.238,11.278 53.746,10.77 54.254,10.77 54.762,11.278 55.27,11.278 55.778,10.77 56.286,10.77 56.794,11.278 57.302,11.278 57.81,10.77 58.877,10.77 59.69,11.582 59.69,13.614 60.198,14.122 60.198,14.63 59.69,15.138 59.69,15.646 60.198,16.154 60.198,16.662 59.69,17.17 59.69,18.186 60.198,18.694 60.198,19.202 59.69,19.71 59.69,20.218 60.198,20.726 60.198,21.234 59.69,21.742 59.69,22.25 60.198,22.758 60.198,23.266 59.69,23.774 59.69,24.282 60.198,24.79 60.198,25.298 59.69,25.806 59.69,26.314 60.198,26.822 60.198,27.33 59.69,27.838 59.69,28.346 60.198,28.854 60.198,29.362 59.69,29.87 59.69,40.183 75.844,56.337 75.844,56.845 75.336,57.353 75.336,57.861 75.844,58.369 75.844,58.877 75.336,59.385 75.336,59.893 75.844,60.401 75.844,60.909 75.336,61.417 75.336,61.925 75.844,62.433 75.844,62.941 75.336,63.449 75.336,63.957 75.844,64.465 75.844,64.973 76.352,65.481 76.352,65.989 75.844,66.497 75.844,67.691 78.003,69.85 80.629,69.85 H3.33@84.439,73.66
VCCIN: H2.48